# Altium PCB rk3288_backend.PcbDoc (part 3 of 3)
Units mm, origin at the board's own origin, x right, y up, seen from the top; angles counter-clockwise.
Board outline 46.39 x 100.03 mm, 4 copper layers (Top Layer, horizontal, vertical, Bottom Layer), stack 0.778 mm thick; 208 components, 207 nets, 778 pads, 333 vias.
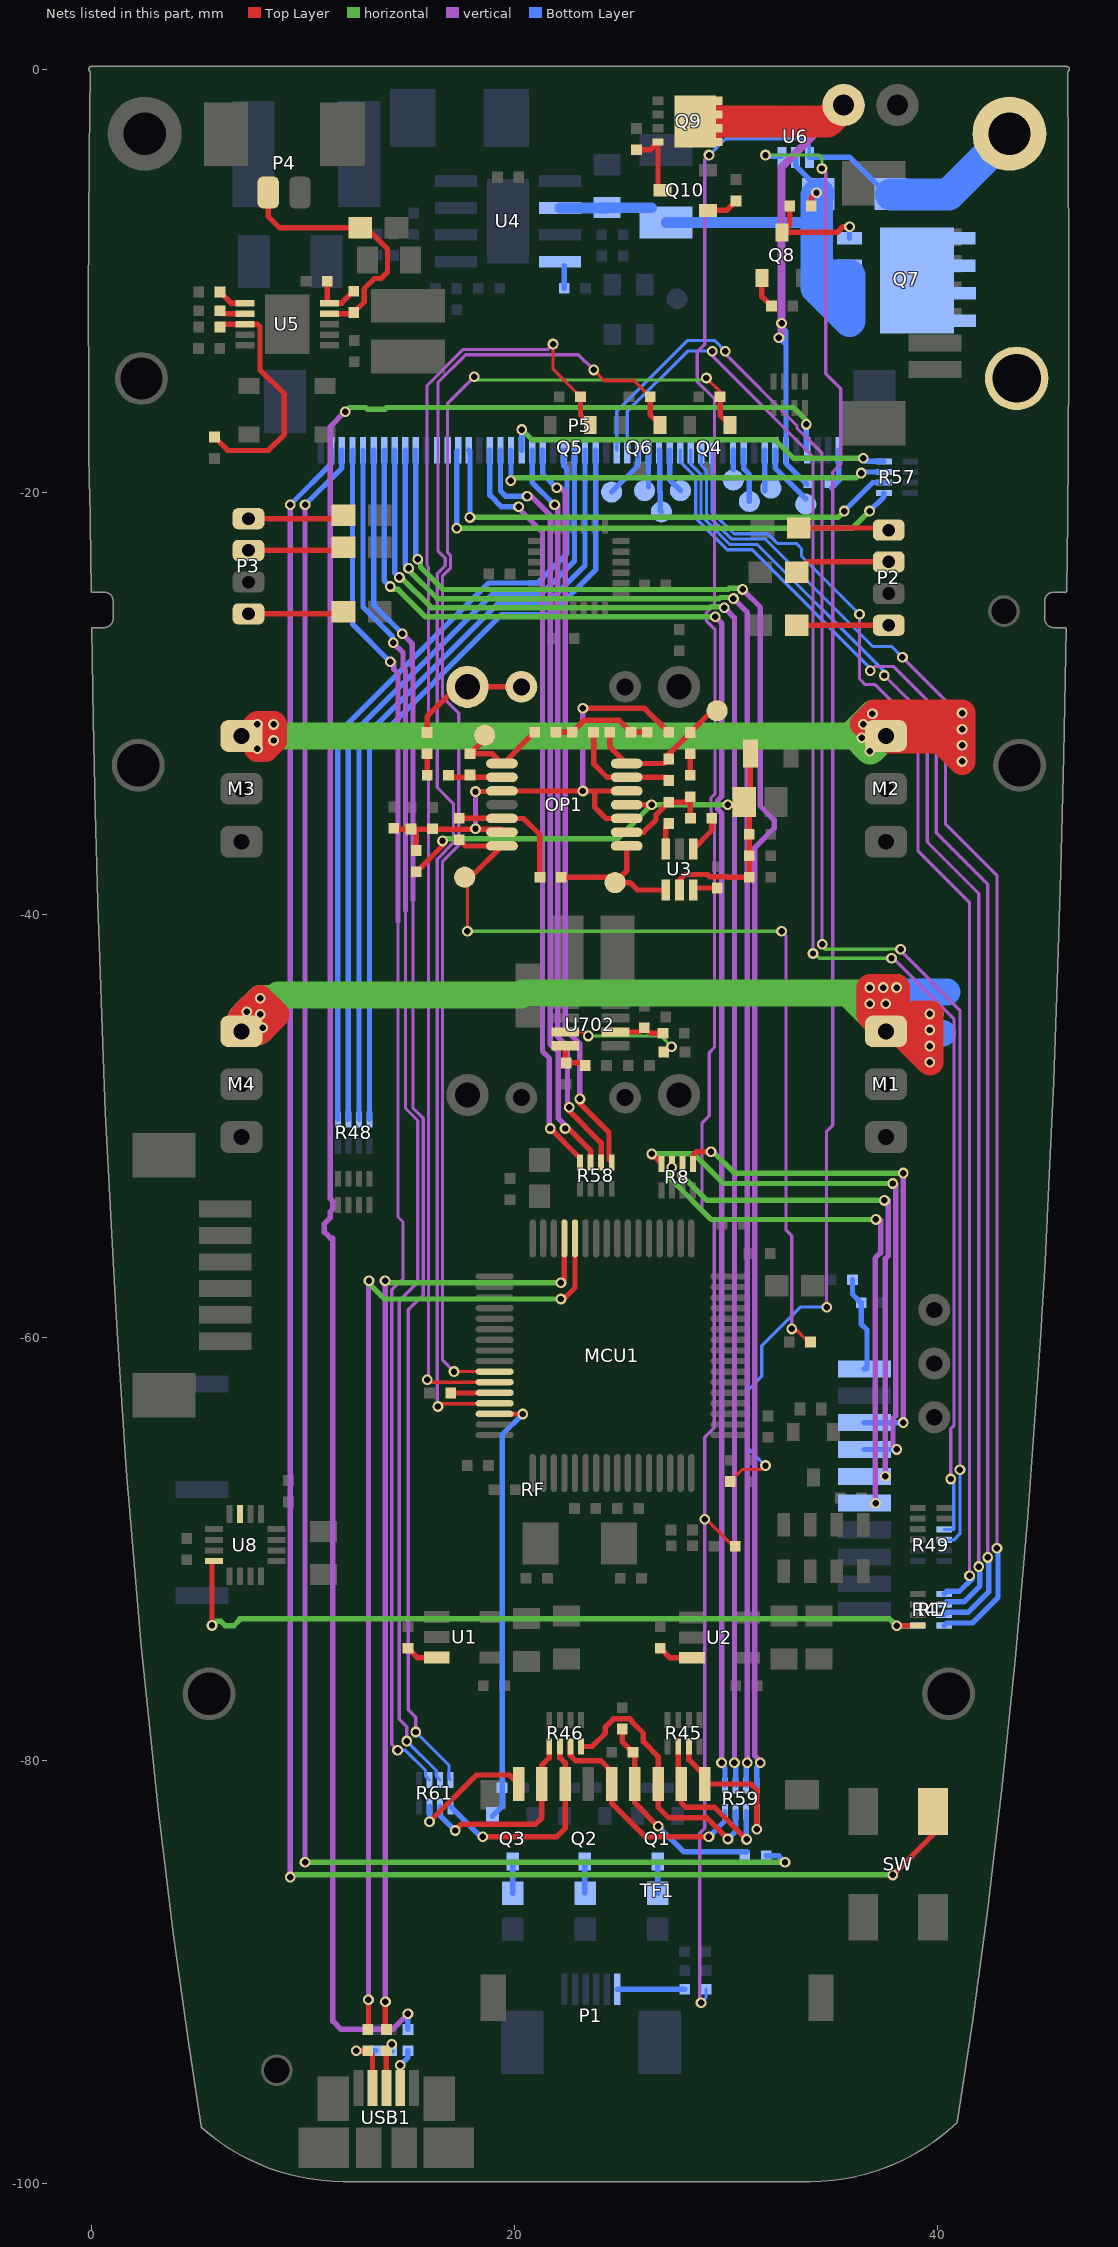
[diagram p5: the nets of this part, all layers, seen from the top]

## Via types
v1: diameter 0.508, hole 0.305, Top Layer to Bottom Layer, 289 vias
v2: diameter 0.508/0.508/0.508/0.508 (per signal layer), hole 0.305, Top Layer to Bottom Layer, 44 vias

## Nets (pads, with @x,y where several pads share a name; then routed paths per layer and width w, separated by ;. In a path a pad name is that pad's centre, name@x,y a point inside that pad or via, vN(x,y) a via of type N, cw(c..) or ccw(c..) an arc to the next point about the centre after c; other vN are vias at no path point) (continued)
NetMCU1_58: MCU1.58 Q4.3 R22.1 | length 64.4
  Top Layer w0.152: v1(17.145,-61.595) 17.146,-61.596 MCU1.58@19.067,-61.596 ; v1(29.083,-14.605) 29.731,-15.253 R22.1@29.731,-15.493
  Top Layer w0.254: R22.1@29.731,-15.493 29.731,-16.368 Q4.3@30.194,-16.831
  vertical w0.152: v1(17.145,-61.595) 16.608,-61.058 16.608,-37.462 17.372,-36.698 17.372,-30.462 16.608,-29.698 16.608,-23.962 16.986,-23.584 16.986,-23.016 16.84,-22.87 16.84,-15.799 v1(18.097,-14.541)
  horizontal w0.152: v1(18.097,-14.541) 18.251,-14.695 28.919,-14.695 28.956,-14.732 v1(29.083,-14.605)
NetMCU1_59: MCU1.59 Q5.3 R23.1 | length 61.6
  Top Layer w0.152: v1(15.875,-61.976) 15.995,-62.096 MCU1.59@19.067,-62.096 ; v1(21.832,-13) 21.832,-14.197 R23.1@23.129,-15.493
  Top Layer w0.254: R23.1@23.129,-15.493 23.129,-16.368 Q5.3@23.592,-16.831
  vertical w0.152: v1(15.875,-61.976) 15.94,-61.911 15.94,-23.55 15.868,-23.479 15.868,-14.975 17.591,-13.252 21.581,-13.252 v1(21.832,-13)
NetMCU1_60: MCU1.60 R3.2 | length 2.1
  Top Layer w0.254: R3.2@16.997,-62.611 MCU1.60@19.052,-62.611
NetMCU1_61: MCU1.61 Q6.3 R24.1 | length 65.1
  Top Layer w0.152: v1(16.383,-63.246) 16.51,-63.119 19.044,-63.119 MCU1.61@19.067,-63.096 ; v1(23.749,-14.224) 24.257,-14.732 25.666,-14.732 R24.1@26.427,-15.493
  Top Layer w0.254: R24.1@26.427,-15.493 26.427,-16.368 Q6.3@26.89,-16.831
  vertical w0.152: v1(16.383,-63.246) 16.354,-63.217 16.354,-37.357 17.118,-36.593 17.118,-34.735 16.354,-33.971 16.354,-23.857 16.732,-23.479 16.732,-23.121 16.383,-22.772 16.383,-14.819 17.697,-13.506 23.031,-13.506 v1(23.749,-14.224)
NetMCU1_62: MCU1.62 Q3.3 R21.1 | length 20.9
  Top Layer w0.254: MCU1.62@19.071,-63.6 v1(20.4,-63.6)
  Bottom Layer w0.254: Q3.3@18.968,-82.618 19.418,-82.168 R21.1@19.418,-81.28 19.418,-64.582 v1(20.4,-63.6)
NetOP1_1: OP1.1 RX-R8.1 T2.1 U3.4 | length 7.2
  Top Layer w0.254: RX-R8.1@22.215,-38.216 24.509,-38.216 T2.1@24.763,-38.47 ; OP1.1@25.313,-36.737 25.313,-37.92 T2.1@24.763,-38.47 ; U3.4@27.161,-38.818 25.818,-38.818 25.47,-38.47 T2.1@24.763,-38.47
NetOP1_2: OP1.2 RX-C3.2 RX-R18.1 RX-R22.1 | length 4.8
  Top Layer w0.254: OP1.2@25.313,-36.087 26.113,-36.087 26.7,-35.5 26.7,-35.271 RX-R22.1@27.303,-34.668 28.057,-34.668 RX-C3.2@28.319,-34.406 RX-R18.1@28.319,-35.414
NetOP1_3: OP1.3 OP1.5 OP1.10 OP1.13 RX-C7.1 RX-C8.1 RX-R10.1 RX-R11.1 RX-R15.2 | length 26.3
  Top Layer w0.254: RX-C8.1@14.3,-35.955 RX-R15.2@15.137,-35.955 ; RX-R15.2@15.111,-35.93 RX-R15.2@15.137,-35.955 ; RX-R11.1@15.365,-36.954 15.365,-36.184 RX-R15.2@15.137,-35.955 ; v1(18.161,-35.917) v1@18.123,-35.955 ; v1(18.161,-34.163) 19.387,-34.163 OP1.10@19.413,-34.137 v1(23.241,-34.137) 23.8,-34.137 ; OP1.13@19.413,-36.087 19.413,-35.955 v1@18.123,-35.955 ; v1(23.241,-30.226) 26.163,-30.226 RX-R10.1@27.295,-31.358 ; OP1.3@25.313,-35.437 24.337,-35.437 23.8,-34.9 23.8,-34.137 ; OP1.5@25.313,-34.137 23.8,-34.137 ; RX-R15.2@15.137,-35.955 v1@18.123,-35.955
  vertical w0.254: v1(18.161,-35.917) v1(18.161,-34.163) ; v1(23.241,-34.137) v1(23.241,-30.226)
NetOP1_6: OP1.6 RX-C4.2 RX-R5.1 | length 5.4
  Top Layer w0.254: RX-C4.2@23.747,-31.358 23.747,-32.847 24.387,-33.487 OP1.6@25.313,-33.487 27.154,-33.487 RX-R5.1@27.303,-33.636
NetOP1_7: OP1.7 RX-C1.2 RX-R5.2 RX-R7.1 T3.1 | length 7
  Top Layer w0.254: RX-C1.2@24.509,-31.358 24.509,-32.033 OP1.7@25.313,-32.837 27.094,-32.837 RX-R5.2@27.303,-32.628 27.303,-32.382 RX-R7.1@28.319,-31.366 T3.1@29.343,-30.342
NetOP1_8: OP1.8 RX-R1.2 RX-R6.1 T1.1 | length 4.6
  Top Layer w0.254: T1.1@18.413,-31.866 RX-R1.2@17.905,-32.374 18.95,-32.374 OP1.8@19.413,-32.837 19.482,-32.837 RX-R6.1@20.961,-31.358
NetOP1_9: OP1.9 RX-C2.2 RX-R1.1 | length 2.6
  Top Layer w0.254: RX-C2.2@16.889,-33.39 16.986,-33.487 OP1.9@19.413,-33.487
NetOP1_12: OP1.12 RX-R3.1 RX-R8.2 | length 6.1
  Top Layer w0.254: RX-R3.1@17.397,-35.43 OP1.12@19.406,-35.43 ; OP1.12@19.413,-35.437 20.437,-35.437 21.207,-36.207 RX-R8.2@21.207,-38.216
NetOP1_14: OP1.14 RX-R3.2 RX-R9.1 T4.1 | length 42.1
  Top Layer w0.152: T4.1@17.651,-38.216 17.78,-38.345 v1(17.78,-40.767) ; v1(33.117,-59.579) 33.29,-59.579 33.909,-60.198 RX-R9.1@34.007,-60.198
  Top Layer w0.254: RX-R3.2@17.397,-36.438 17.696,-36.737 OP1.14@19.413,-36.737 17.934,-38.216 T4.1@17.651,-38.216
  vertical w0.152: v1(32.639,-40.767) 32.842,-40.97 32.842,-54.891 33.117,-55.166 v1(33.117,-59.579)
  horizontal w0.152: v1(17.78,-40.767) v1(32.639,-40.767)
NetP1_1: P1.1 R4.1 | length 3.2
  Bottom Layer w0.254: P1.1@24.871,-90.805 R4.1@28.054,-90.805
NetP2_1: P2.1 R36.1 | length 4.4
  Top Layer w0.254: R36.1@33.35,-26.3 P2.1@37.7,-26.3
NetP2_3: P2.3 R37.1 | length 4.6
  Top Layer w0.254: R37.1@33.35,-23.8 33.85,-23.3 P2.3@37.7,-23.3
NetP2_4: P2.4 R38.1 | length 4.2
  Top Layer w0.254: R38.1@33.45,-21.7 P2.4@37.6,-21.7
NetP3_1: P3.1 R33.1 | length 4.4
  Top Layer w0.254: P3.1@7.424,-25.759 R33.1@11.822,-25.759
NetP3_3: P3.3 R34.1 | length 4.3
  Top Layer w0.254: P3.3@7.424,-22.759 R34.1@11.774,-22.759
NetP3_4: P3.4 R35.1 | length 4.3
  Top Layer w0.254: P3.4@7.424,-21.259 R35.1@11.75,-21.259
NetP4_1: P4.1 R5.2 R27.2 U5.9 | length 12.4
  Top Layer w0.254: P4.1@8.361,-5.834 8.361,-6.961 8.9,-7.5 R5.2@12.712,-7.5 13.002,-7.5 14,-8.498 14,-9.6 13.7,-9.9 13.381,-9.9 12.9,-10.381 12.9,-11.008 R27.2@12.4,-11.508 12.343,-11.565 U5.9@11.25,-11.565
NetP5_1: P5.1 R62.2 | length 1.9
  Bottom Layer w0.254: R62.2@35.008,-19.8 35.343,-19.465 P5.1@35.343,-18.014
NetP5_4: P5.4 R55.2 | length 105.3
  vertical w0.254: v1(12,-16.2) 11.3,-16.9 11.3,-53.418 11.408,-53.525 11.408,-53.925 11.3,-54.032 11.3,-54.317 11.017,-54.6 11.017,-55 11.3,-55.282 11.417,-55.282 11.417,-92.317 11.8,-92.7 14.231,-92.7 v1(14.965,-91.965)
  horizontal w0.254: v1(12,-16.2) 12.198,-16.002 12.963,-16.002 13.052,-16.091 13.872,-16.091 13.961,-16.002 33.202,-16.002 33.8,-16.6 v1(33.8,-16.8)
  Bottom Layer w0.254: R55.2@14.965,-92.71 v1(14.965,-91.965) ; P5.4@33.8,-17.971 v1(33.8,-16.8) v1@33.8,-16.7
NetP5_7: P5.7 T5.1 | length 2.9
  Bottom Layer w0.254: P5.7@32.343,-18.014 32.343,-18.881 33.126,-19.664 T5.1@33.782,-20.32
NetP5_8: P5.8 T6.1 | length 1.9
  Bottom Layer w0.254: T6.1@31.843,-19.939 P5.8@31.843,-18.014
NetP5_10: P5.10 T7.1 | length 2.5
  Bottom Layer w0.254: P5.10@30.843,-18.014 30.843,-18.891 31.082,-19.129 31.082,-19.144 31.115,-19.177 T7.1@31.115,-20.447
NetP5_11: P5.11 T8.1 | length 0.9
  Bottom Layer w0.254: T8.1@30.343,-18.957 P5.11@30.343,-18.014
NetP5_13: P5.13 R47.1 | length 61.8
  vertical w0.152: v1(36.322,-25.781) 36.322,-28.829 36.599,-29.106 37.061,-29.106 39.093,-31.138 39.093,-36.98 41.529,-39.416 41.529,-70.636 ; v1(41.529,-71.247) 41.528,-70.637
  Bottom Layer w0.152: P5.13@29.343,-18.014 29.343,-20.926 30.389,-21.971 31.982,-21.971 32.439,-22.428 33.326,-22.428 33.579,-22.681 33.579,-23.038 v1(36.322,-25.781)
  Bottom Layer w0.254: R47.1@40.328,-72.11 40.455,-71.983 41.047,-71.983 41.656,-71.374 v1(41.529,-71.247)
NetP5_14: P5.14 R47.4 | length 64.6
  vertical w0.152: v1(38.354,-27.813) 40.386,-29.845 40.386,-35.687 42.822,-38.123 v1(42.822,-69.954)
  Bottom Layer w0.152: P5.14@28.843,-18.014 28.843,-18.726 29.083,-18.966 29.083,-21.025 30.283,-22.225 31.877,-22.225 36.957,-27.305 37.846,-27.305 v1(38.354,-27.813)
  Bottom Layer w0.254: R47.4@40.328,-73.61 40.455,-73.483 41.668,-73.483 42.874,-72.278 42.874,-70.005 v1(42.822,-69.954)
NetP5_15: P5.15 R47.2 | length 62
  vertical w0.152: v1(37.492,-28.675) 39.524,-30.707 39.524,-36.549 41.96,-38.985 41.96,-70.205 ; v1(41.96,-70.816) 41.959,-70.206
  Bottom Layer w0.152: P5.15@28.343,-18.014 28.343,-18.691 28.829,-19.177 28.829,-21.13 30.178,-22.479 31.496,-22.479 v1@37.492,-28.475
  Bottom Layer w0.254: R47.2@40.328,-72.61 40.455,-72.483 41.254,-72.483 42.012,-71.726 42.012,-70.867 v1(41.96,-70.816)
NetP5_16: P5.16 R47.3 | length 64.3
  vertical w0.152: v1(36.83,-28.448) 37.034,-28.244 37.312,-28.244 ; 37.313,-28.243 37.922,-28.243 39.955,-30.276 39.955,-36.118 42.391,-38.554 42.391,-69.774 ; v1@42.39,-70.384 42.39,-69.775
  Bottom Layer w0.152: P5.16@27.843,-18.014 27.843,-18.572 28.575,-19.304 28.575,-21.235 30.073,-22.733 31.242,-22.733 v1@36.957,-28.448
  Bottom Layer w0.254: R47.3@40.328,-73.11 40.455,-72.983 41.461,-72.983 42.443,-72.002 42.443,-70.436 v1(42.391,-70.385)
NetP5_17: P5.17 T9.1 | length 2.1
  Bottom Layer w0.254: P5.17@27.343,-18.014 27.343,-19.422 T9.1@27.855,-19.934
NetP5_18: P5.18 T10.1 | length 3
  Bottom Layer w0.254: P5.18@26.843,-18.014 26.884,-18.055 26.884,-19.984 26.9,-20 26.9,-20.879 T10.1@26.955,-20.934
NetP5_19: P5.19 T11.1 | length 1.7
  Bottom Layer w0.254: T11.1@26.343,-19.746 P5.19@26.343,-18.014
NetP5_20: P5.20 T12.1 | length 2.5
  Bottom Layer w0.254: T12.1@24.6,-20 25.843,-18.757 P5.20@25.843,-18.014
NetP5_21: P5.21 R49.1 | length 70.2
  vertical w0.152: v1(29.362,-13.335) 29.362,-13.56 34.124,-18.321 34.124,-41.211 ; v1(34.124,-41.822) 34.124,-41.212 ; v1(37.835,-42.048) 37.912,-42.048 40.797,-44.933 40.797,-64.143 40.639,-64.301 v1(40.64,-66.675)
  horizontal w0.152: v1(34.124,-41.822) 34.202,-41.822 34.428,-42.048 v1(37.835,-42.048)
  Bottom Layer w0.152: P5.21@25.343,-18.014 25.343,-16.186 28.194,-13.335 v1(29.362,-13.335) ; R49.1@40.328,-69.062 40.78,-69.062 40.78,-66.815 v1(40.64,-66.675)
NetP5_22: P5.22 R49.2 | length 72
  vertical w0.152: v1(29.972,-13.335) 29.972,-13.462 33.368,-16.858 33.368,-16.979 34.555,-18.166 v1(34.555,-41.391) ; v1(38.266,-41.617) 38.266,-41.695 41.071,-44.5 v1(41.071,-66.244)
  horizontal w0.152: v1(34.555,-41.391) 34.555,-41.468 34.704,-41.617 37.655,-41.617 ; 37.656,-41.617 v1@38.265,-41.617
  Bottom Layer w0.152: P5.22@24.843,-18.014 24.843,-16.178 28.194,-12.827 29.465,-12.827 v1(29.972,-13.335) ; R49.2@40.328,-69.562 40.78,-69.562 41.072,-69.27 v1@41.072,-66.245
NetP5_24: P5.24 R48.8 | length 37.4
  Bottom Layer w0.254: R48.8@13.15,-49.675 13.15,-32.05 19.4,-25.8 21.721,-25.8 23.843,-23.678 P5.24@23.843,-18.014
NetP5_25: P5.25 R48.7 | length 37.4
  Bottom Layer w0.254: R48.7@12.65,-49.675 12.65,-31.843 19.193,-25.3 21.514,-25.3 23.343,-23.471 P5.25@23.343,-18.014
NetP5_26: P5.26 R48.6 | length 37.4
  Bottom Layer w0.254: R48.6@12.15,-49.675 12.15,-31.636 18.986,-24.8 21.307,-24.8 22.843,-23.264 P5.26@22.843,-18.014
NetP5_27: P5.27 R48.5 | length 37.6
  Bottom Layer w0.254: R48.5@11.65,-49.675 11.65,-31.429 18.779,-24.3 21.1,-24.3 22.488,-22.912 22.488,-18.911 22.343,-18.766 P5.27@22.343,-18.014
NetP5_29: P5.29 R58.5 | length 35.2
  Top Layer w0.254: v1(23.1,-48.7) 23.1,-48.914 24.478,-50.292 24.478,-51.572 R58.5@24.605,-51.699
  vertical w0.254: v1(22,-19.8) 22.2,-19.8 22.4,-20 22.4,-45.4 23.1,-46.1 v1(23.1,-48.7)
  Bottom Layer w0.254: P5.29@21.343,-18.014 21.343,-19.143 v1(22,-19.8)
NetP5_30: P5.30 R58.6 | length 35.3
  Top Layer w0.254: v1(22.6,-49.1) 22.6,-49.276 24.105,-50.781 R58.6@24.105,-51.699
  vertical w0.254: v1(21.9,-20.6) 22.044,-20.6 22.044,-45.752 22.511,-46.218 22.511,-49.186 22.597,-49.1 v1(22.6,-49.1)
  Bottom Layer w0.254: P5.30@20.843,-18.014 20.843,-19.543 v1(21.9,-20.6)
NetP5_31: P5.31 R57.4 | length 18.7
  horizontal w0.254: v1(20.343,-17.043) 20.826,-17.526 32.326,-17.526 33.2,-18.4 v1(36.5,-18.4)
  Bottom Layer w0.254: P5.31@20.343,-18.014 v1(20.343,-17.043) ; v1(36.5,-18.4) 36.65,-18.55 R57.4@37.475,-18.55
NetP5_32: P5.32 R57.3 | length 19.3
  horizontal w0.254: v1(19.826,-19.464) 19.972,-19.317 36.183,-19.317 v1(36.4,-19.1)
  Bottom Layer w0.254: v1(19.826,-19.464) 19.8,-19.438 19.8,-19.4 19.843,-19.357 P5.32@19.843,-18.014 ; v1(36.4,-19.1) 36.45,-19.05 R57.3@37.475,-19.05
NetP5_33: P5.33 R58.7 | length 36.2
  Top Layer w0.254: v1(22.4,-50.1) 22.562,-50.1 23.605,-51.143 R58.7@23.605,-51.699
  vertical w0.254: v1(20.6,-20.2) 20.8,-20.2 21.689,-21.089 21.689,-46.103 22.079,-46.494 22.079,-49.617 22.4,-49.938 v1(22.4,-50.1)
  Bottom Layer w0.254: P5.33@19.343,-18.014 19.343,-19.943 19.6,-20.2 v1(20.6,-20.2)
NetP5_34: P5.34 R58.8 | length 35.9
  Top Layer w0.254: v1(21.7,-50.1) 23.105,-51.505 R58.8@23.105,-51.699
  vertical w0.254: v1(20.2,-20.7) 20.2,-20.767 21.333,-21.9 21.333,-46.455 21.648,-46.77 21.648,-50.048 v1(21.7,-50.1)
  Bottom Layer w0.254: P5.34@18.843,-18.014 18.843,-20.143 19.4,-20.7 v1(20.2,-20.7)
NetP5_36: P5.36 R57.2 | length 23.5
  horizontal w0.254: v1(17.9,-21.2) 35.3,-21.2 v1(35.6,-20.9)
  Bottom Layer w0.254: P5.36@17.843,-18.014 17.9,-18.071 v1(17.9,-21.2) ; v1(35.6,-20.9) 36.95,-19.55 R57.2@37.475,-19.55
NetP5_37: P5.37 R57.1 | length 24.7
  horizontal w0.254: v1(17.272,-21.717) 35.983,-21.717 36,-21.7 v1(36.8,-20.9)
  Bottom Layer w0.254: v1(17.272,-21.717) 17.272,-18.086 P5.37@17.3,-18.058 ; v1(36.8,-20.9) 37.475,-20.225 R57.1@37.475,-20.05
NetP5_38: P5.38
NetP5_39: P5.39
NetP5_41: P5.41 R59.8 | length 79.1
  vertical w0.254: v1(30.793,-24.607) 31.628,-25.442 31.628,-34.845 32.283,-35.5 32.283,-35.9 31.374,-36.809 31.374,-79.773 31.628,-80.027 v1(31.628,-80.1)
  horizontal w0.254: v1(15.427,-23.173) 15.561,-23.307 15.561,-23.539 16.628,-24.607 30.111,-24.607 30.162,-24.555 30.742,-24.555 v1(30.793,-24.607)
  Bottom Layer w0.254: P5.41@15.343,-18.014 15.343,-23.09 v1(15.427,-23.173) ; R59.8@31.463,-81.163 31.463,-80.337 31.628,-80.173 v1(31.628,-80.1)
NetP5_42: P5.42 R59.7 | length 78.1
  vertical w0.254: v1(30.362,-25.038) 31.018,-25.694 v1(31.018,-80.1)
  horizontal w0.254: v1(14.996,-23.604) 14.996,-23.682 16.352,-25.038 29.68,-25.038 29.731,-24.986 30.311,-24.986 v1(30.362,-25.038)
  Bottom Layer w0.254: P5.42@14.843,-18.014 14.843,-23.452 v1(14.996,-23.604) ; R59.7@30.963,-81.163 30.963,-80.155 v1(31.018,-80.1)
NetP5_43: P5.43 R59.6 | length 78.2
  vertical w0.254: v1(29.931,-25.469) 30.409,-25.947 30.409,-34.426 30.57,-34.587 30.57,-34.987 30.409,-35.148 v1(30.409,-80.1)
  horizontal w0.254: v1(14.565,-24.035) 14.642,-24.035 16.076,-25.469 29.249,-25.469 29.3,-25.417 29.879,-25.417 v1(29.931,-25.469)
  Bottom Layer w0.254: P5.43@14.343,-18.014 14.343,-23.814 v1(14.565,-24.035) ; v1(30.409,-80.1) 30.463,-80.155 R59.6@30.463,-81.163
NetP5_44: P5.44 R59.5 | length 78.1
  vertical w0.254: v1(29.5,-25.9) 29.799,-26.199 29.799,-34.392 29.604,-34.587 29.604,-34.987 29.799,-35.182 v1(29.799,-80.1)
  horizontal w0.254: v1(14.134,-24.466) 14.268,-24.6 14.5,-24.6 15.8,-25.9 v1(29.5,-25.9)
  Bottom Layer w0.254: P5.44@13.843,-18.014 13.843,-24.176 v1(14.134,-24.466) ; v1(29.799,-80.1) 29.799,-80.173 29.963,-80.337 R59.5@29.963,-81.163
NetP5_45: P5.45 R61.8 | length 65
  vertical w0.152: 15.207,-39.283 15.207,-49.138 15.686,-49.616 15.686,-57.974 14.986,-58.674 14.986,-77.597 15.34,-77.951 v1(15.34,-78.64)
  vertical w0.254: v1(14.7,-26.7) 15.162,-27.162 15.162,-28.236 15.207,-28.281 15.207,-39.283
  Bottom Layer w0.152: v1(15.34,-78.64) 16.909,-80.209 16.909,-80.833 R61.8@16.985,-80.909
  Bottom Layer w0.254: P5.45@13.343,-18.014 13.343,-25.343 v1(14.7,-26.7)
NetP5_46: P5.46 R61.7 | length 65.1
  vertical w0.152: 14.852,-39.79 14.852,-49.141 15.432,-49.721 15.432,-57.366 14.555,-58.243 14.555,-78.028 14.909,-78.382 14.909,-78.46 ; v1(14.909,-79.071) 14.908,-78.461
  vertical w0.254: v1(14.269,-27.131) 14.731,-27.593 14.731,-28.308 14.852,-28.429 14.852,-39.79
  Bottom Layer w0.152: v1(14.909,-79.071) 14.914,-79.071 16.303,-80.46 16.303,-80.727 R61.7@16.485,-80.909
  Bottom Layer w0.254: P5.46@12.843,-18.014 12.843,-25.443 14.217,-26.817 14.217,-27.08 v1(14.269,-27.131)
NetP5_47: P5.47 R61.6 | length 65.2
  vertical w0.152: v1(14.478,-79.502) 14.205,-79.229 14.205,-57.731 14.732,-57.204 14.732,-54.521 14.496,-54.286 14.496,-40.296
  vertical w0.254: v1(14.124,-28.024) 14.3,-28.024 14.3,-28.38 14.496,-28.576 14.496,-40.296
  Bottom Layer w0.152: v1@14.479,-79.503 14.846,-79.503 15.803,-80.46 15.803,-80.727 R61.6@15.985,-80.909
  Bottom Layer w0.254: P5.47@12.343,-18.014 12.343,-26.243 v1(14.124,-28.024)
NetP5_49: P5.49 SW.2 | length 101.1
  Top Layer w0.254: v1(37.9,-85.4) 39.8,-83.5 SW.2@39.8,-82.4 SW.2@39.3,-82.4
  vertical w0.254: v1(9.4,-85.5) v1(9.4,-20.6)
  horizontal w0.254: v1(9.4,-85.5) 9.5,-85.4 v1(37.9,-85.4)
  Bottom Layer w0.254: v1(9.4,-20.6) 11.343,-18.657 P5.49@11.343,-18.014
NetQ1_D: Q1.1 R30.2 | length 1.5
  Bottom Layer w0.254: R30.2@26.776,-86.258 Q1.1@26.776,-84.768
NetQ2_D: Q2.1 R31.2 | length 1.5
  Bottom Layer w0.254: R31.2@23.334,-86.245 Q2.1@23.334,-84.768
NetQ3_D: Q3.1 R32.2 | length 1.5
  Bottom Layer w0.254: R32.2@19.918,-86.258 Q3.1@19.918,-84.768
NetQ7_G: Q7.G Q8.1 R39.1 | length 5.2
  Top Layer w0.254: R39.1@33.028,-6.477 33.028,-7.346 Q8.1@32.657,-7.717 35.283,-7.717 35.552,-7.448 v1(35.852,-7.448)
  Bottom Layer w0.254: Q7.G@35.852,-7.996 v1(35.852,-7.448)
NetQ8_G: Q8.3 R40.1 | length 1.5
  Top Layer w0.254: Q8.3@31.707,-9.867 31.707,-10.755 R40.1@32.157,-11.205
NetQ9_G: Q9.G Q10.1 R41.1 | length 3.2
  Top Layer w0.254: R41.1@25.777,-3.817 26.42,-3.817 Q9.G@26.793,-3.444 Q10.1@26.793,-5.522
NetQ10_G: Q10.3 R42.1 | length 1.5
  Top Layer w0.254: Q10.3@29.151,-6.68 30.026,-6.68 R42.1@30.476,-6.23
NetR1_4: R1.4 R47.5 U8.4 | length 37.9
  Top Layer w0.254: v1(5.7,-73.6) 5.7,-70.652 U8.4@5.803,-70.549 ; v1(38.09,-73.61) R1.4@39.078,-73.61
  horizontal w0.254: v1(5.7,-73.6) 5.894,-73.406 6.118,-73.406 6.328,-73.617 6.728,-73.617 7.011,-73.334 7.011,-73.285 37.744,-73.285 37.865,-73.406 37.871,-73.412 37.892,-73.412 v1(38.09,-73.61)
  Bottom Layer w0.254: v1(38.09,-73.61) R47.5@39.078,-73.61
NetR8_5: R8.5 RF.3 | length 24.5
  Top Layer w0.254: R8.5@28.45,-51.775 28.45,-51.35 28.6,-51.2 v1(29.3,-51.2)
  vertical w0.254: v1(38.392,-64.008) v1(38.392,-52.208)
  horizontal w0.254: v1(29.3,-51.2) 29.4,-51.2 30.408,-52.208 v1(38.392,-52.208)
  Bottom Layer w0.254: RF.3@36.552,-64.009 v1(38.392,-64.008)
NetR8_6: R8.6 RF.5 | length 24
  Top Layer w0.254: v1(27.946,-52.294) 27.946,-51.779 R8.6@27.95,-51.775
  vertical w0.254: v1(37.5,-53.5) 37.519,-53.481 37.681,-53.481 37.681,-56.119 37.548,-56.252 v1(37.548,-66.548)
  horizontal w0.254: v1(27.946,-52.294) 27.94,-52.3 27.9,-52.3 29.1,-53.5 v1(37.5,-53.5)
NetR8_7: R8.7 RF.6 | length 24.8
  Top Layer w0.254: R8.7@27.446,-51.954 v1(27.446,-51.932)
  vertical w0.254: v1(37.082,-67.818) 37.065,-67.801 37.065,-56.232 37.325,-55.972 37.325,-54.425 37.3,-54.4 v1(37.1,-54.4)
  horizontal w0.254: v1(27.446,-51.932) 27.4,-51.978 27.4,-52.5 29.3,-54.4 v1(37.1,-54.4)
NetR8_8: R8.8 RF.4 | length 27
  Top Layer w0.254: v1(26.5,-51.3) 26.95,-51.75 R8.8@26.95,-51.775
  vertical w0.254: v1(37.9,-52.7) 38,-52.7 38.036,-52.736 38.036,-63.681 37.909,-63.808 37.909,-65.109 v1(38.078,-65.278)
  horizontal w0.254: v1(26.5,-51.3) 28.5,-51.3 29.9,-52.7 v1(37.9,-52.7)
  Bottom Layer w0.254: RF.4@36.552,-65.279 v1(38.078,-65.278)
NetR10_2: R10.2 U1.3 | length 1.6
  Top Layer w0.254: R10.2@14.965,-74.676 15.41,-75.12 U1.3@16.332,-75.12
NetR11_2: R11.2 U2.3 | length 1.7
  Top Layer w0.254: R11.2@26.903,-74.676 27.361,-75.133 U2.3@28.397,-75.133
NetR12_1: R12.1 U6.6 | length 70.7
  Top Layer w0.152: R12.1@30.205,-66.794 30.774,-66.226 31.691,-66.226 v1(31.877,-66.04)
  vertical w0.152: v1(34.544,-4.699) 34.722,-4.877 34.722,-14.402 35.433,-15.113 35.433,-18.669 35.052,-19.05 35.052,-49.937 34.768,-50.221 v1(34.768,-58.547)
  horizontal w0.152: v1(31.877,-4.064) 34.417,-4.064 34.544,-4.191 v1(34.544,-4.699)
  Bottom Layer w0.152: v1(31.877,-66.04) 30.988,-65.151 30.988,-62.536 31.699,-61.825 31.699,-60.376 33.528,-58.547 v1(34.768,-58.547) ; v1(31.877,-4.064) 31.983,-4.17 U6.6@32.65,-4.17
NetR19_1: R19.1 U4.4 | length 1.1
  Bottom Layer w0.254: R19.1@22.361,-10.36 U4.4@22.361,-9.303
NetR25_2: R25.2 U5.2 | length 1
  Top Layer w0.254: R25.2@6.21,-11.565 U5.2@7.25,-11.565
NetR27_1: R27.1 R29.2 U5.10 | length 2.3
  Top Layer w0.254: U5.10@11.155,-10.97 R29.2@11.155,-10.033 ; U5.10@11.25,-11.065 11.835,-11.065 R27.1@12.4,-10.5
NetR28_2: R28.2 U5.1 | length 1.4
  Top Layer w0.254: R28.2@6.075,-10.541 6.599,-11.065 U5.1@7.25,-11.065
NetR43_2: R43.2 R65.2 U5.3 | length 11.3
  Top Layer w0.254: R65.2@5.818,-17.4 6.453,-18.035 8.358,-18.035 9.12,-17.273 9.12,-15.368 7.972,-14.22 7.972,-12.188 7.85,-12.066 U5.3@7.25,-12.065 ; R43.2@6.202,-12.065 U5.3@7.25,-12.065
NetR45_2: R45.2 R59.2 TF1.2 | length 7.3
  Top Layer w0.254: TF1.2@27.75,-80.95 R45.2@27.75,-79.325 ; TF1.2@27.9,-81.1 27.9,-82 28.1,-82.2 29.462,-82.2 v1(30.981,-83.719)
  Bottom Layer w0.254: 30.963,-83.436 R59.2@30.963,-82.413
NetR45_3: R45.3 R59.1 TF1.1 | length 7.4
  Top Layer w0.254: R45.3@28.25,-79.325 28.25,-79.95 29,-80.7 TF1.1@29,-81.1 31.2,-81.1 31.463,-81.363 v1(31.463,-83.237)
  Bottom Layer w0.254: v1(31.463,-83.237) R59.1@31.463,-82.413
NetR46_1: R46.1 R61.2 TF1.8 | length 9.3
  Top Layer w0.254: v1(17.2,-83.3) 17.5,-83 21,-83 21.3,-82.7 TF1.8@21.3,-81.1 21.3,-80.2 21.65,-79.85 R46.1@21.65,-79.325
  Bottom Layer w0.254: R61.2@16.485,-82.159 16.485,-82.585 v1(17.2,-83.3)
NetR46_2: R46.2 R61.1 TF1.7 | length 10.2
  Top Layer w0.254: v1(18.5,-83.6) 22,-83.6 22.4,-83.2 TF1.7@22.4,-81.1 22.4,-80.1 22.15,-79.85 R46.2@22.15,-79.325
  Bottom Layer w0.254: R61.1@16.985,-82.159 18.426,-83.6 v1(18.5,-83.6)
NetR46_3: R46.3 R59.4 TF1.5 | length 10.4
  Top Layer w0.254: R46.3@22.65,-79.325 22.65,-79.75 22.9,-80 24.1,-80 TF1.5@24.6,-80.5 ; TF1.5@24.6,-81.1 24.6,-82 26.2,-83.6 v1(29.2,-83.6)
  Bottom Layer w0.254: v1(29.2,-83.6) 29.963,-82.837 R59.4@29.963,-82.413
NetR46_4: R46.4 R59.3 TF1.3 | length 13.3
  Top Layer w0.254: R46.4@23.15,-79.117 R46.4@23.15,-79.325 23.675,-79.325 24.3,-78.7 24.3,-78.4 24.683,-78.017 25.449,-78.017 25.583,-78.151 25.583,-78.183 26.1,-78.7 26.1,-79.1 26.8,-79.8 TF1.3@26.8,-81.1 26.8,-82.2 27.3,-82.7 29.1,-82.7 v1(30.1,-83.7)
  Bottom Layer w0.254: v1(30.1,-83.7) 30.463,-83.337 R59.3@30.463,-82.413
NetR51_1: R51.1 R53.1 USB1.2 | length 3.4
  Top Layer w0.254: v1(12.518,-93.718) R51.1@13.06,-93.718 ; R51.1@13.082,-93.782 R51.1@13.082,-93.74 ; USB1.2@13.289,-95.479 13.289,-93.947 R51.1@13.082,-93.74 ; R51.1@13.06,-93.718 13.082,-93.718 R51.1@13.082,-93.74 ; R51.1@13.06,-93.718 R51.1@13.082,-93.74
  Bottom Layer w0.254: v1(12.518,-93.718) R53.1@13.441,-93.718
NetR52_1: R52.1 R54.1 USB1.3 | length 2.4
  Top Layer w0.254: USB1.3@13.949,-95.479 R52.1@13.949,-93.718 ; R52.1@13.949,-93.657 v1(14.203,-93.403)
  Bottom Layer w0.254: R54.1@14.203,-93.718 v1(14.203,-93.403)
NetR55_1: R55.1 USB1.4 | length 1.9
  Top Layer w0.254: USB1.4@14.599,-95.479 v1(14.599,-94.401)
  Bottom Layer w0.254: v1(14.599,-94.401) 14.965,-94.035 R55.1@14.965,-93.718
NetR61_3: R61.3 TF1.9 | length 6
  Top Layer w0.254: v1(15.985,-82.885) 18.2,-80.671 19.771,-80.671 TF1.9@20.2,-81.1
  Bottom Layer w0.254: v1(15.985,-82.885) R61.3@15.985,-82.159
NetR701_1: R701.1 U702.7 | length 5.8
  Top Layer w0.152: U702.7@22.408,-45.537 23.312,-45.537 v1(23.495,-45.72) ; R701.1@27.059,-46.482 27.313,-46.228 v1(27.432,-46.228)
  horizontal w0.152: v1(23.495,-45.72) 26.924,-45.72 v1(27.432,-46.228)
NetR702_1: R702.1 R703.2 U702.8 | length 1.5
  Top Layer w0.254: R702.1@22.408,-46.947 U702.8@22.408,-46.187 ; R702.1@22.458,-46.998 R703.2@23.228,-46.998
NetR705_2: R705.2 R706.1 U702.2 | length 2.2
  Top Layer w0.254: U702.2@24.776,-45.537 R706.1@25.935,-45.537 ; R706.1@26.141,-45.331 26.403,-45.593 R705.2@27.03,-45.593
NetR?_2: R?.2 RF.1 | length 4.6
  Bottom Layer w0.254: R?.2@35.993,-57.252 35.993,-57.938 R?.2@36.4,-58.345 36.4,-59.339 36.678,-59.617 36.678,-61.469 RF.1@36.552,-61.469
NetRX1_2: RX1.2 RX2.2 RX-R4.1 | length 5.8
  Top Layer w0.254: RX-R4.1@15.873,-31.366 15.873,-30.622 17.285,-29.21 RX1.2@17.785,-29.21 RX2.2@20.335,-29.21
NetRX-C1_1: RX-C1.1 RX-C4.1 RX-R6.2 RX-R10.2 | length 4.8
  Top Layer w0.254: RX-R6.2@21.969,-31.358 RX-C4.1@22.739,-31.358 23.297,-30.8 24.959,-30.8 RX-C1.1@25.517,-31.358 RX-R10.2@26.287,-31.358
NetRX-C2_1: RX-C2.1 RX-R4.2 | length 1
  Top Layer w0.254: RX-R4.2@15.873,-32.374 15.881,-32.382 RX-C2.1@15.881,-33.39
NetRX-C3_1: RX-C3.1 RX-R7.2 | length 1
  Top Layer w0.254: RX-C3.1@28.319,-33.398 RX-R7.2@28.319,-32.374
NetRX-R18_2: RX-R18.2 U3.1 | length 1.8
  Top Layer w0.254: U3.1@28.461,-36.878 29.335,-36.004 RX-R18.2@29.335,-35.422
NetRX-R20_2: RX-R20.2 U3.6 | length 1
  Top Layer w0.254: U3.6@28.555,-38.724 RX-R20.2@29.589,-38.724
NetRX-R22_2: RX-R22.2 U3.3 | length 1.1
  Top Layer w0.254: U3.3@27.161,-36.878 RX-R22.2@27.161,-35.818
NetU8_15: U8.15
USB_N: MCU1.44 R51.2 | length 48.1
  Top Layer w0.254: R51.2@13.1,-92.7 v1(13.1,-91.3) ; v1(22.2,-58.162) 22.336,-58.162 22.867,-57.631 MCU1.44@22.867,-55.296
  vertical w0.254: v1(13.1,-91.3) 13.1,-57.324 v1(13.124,-57.3)
  horizontal w0.254: v1(13.124,-57.3) 13.124,-57.436 13.85,-58.162 v1(22.2,-58.162)
USB_P: MCU1.45 R52.2 | length 45.8
  Top Layer w0.254: R52.2@13.9,-92.6 v1(13.9,-91.4) ; v1(22.2,-57.4) 22.367,-57.233 MCU1.45@22.367,-55.296
  vertical w0.254: v1(13.886,-57.3) 13.9,-57.314 v1(13.9,-91.4)
  horizontal w0.254: v1(13.886,-57.3) 13.986,-57.4 v1(22.2,-57.4)
V3288: 3288+.1 P5.6 Q9.D R62.1 | length 30.1
  Top Layer w0.254: Q9.D@29.693,-3.444 Q9.D@29.693,-2.794 29.693,-2.469 Q9.D@29.693,-2.144 Q9.D@29.693,-1.494
  Top Layer w1.524: Q9.D@28.553,-2.469 29.693,-2.469 34.808,-2.469 3288+.1@35.574,-1.703
  vertical w0.381: v1(32.512,-12.7) 32.639,-12.573 32.639,-12.192 32.639,-4.638 3288+.1@35.574,-1.703
  Bottom Layer w0.254: v1(32.512,-12.7) 32.843,-13.031 ; v2(32.639,-12.011) 32.639,-12.192 32.843,-12.396 32.843,-13.031 ; R62.1@33.838,-19.637 32.843,-18.643 P5.6@32.843,-18.014 32.843,-13.031
VBAT: Bat+.1 R4.2 R9.1 R13.1 U6.4 | length 108.8
  Top Layer w0.152: v1(29.004,-68.58) 29.083,-68.58 30.353,-69.85 R13.1@30.451,-69.85
  vertical w0.152: v1(28.829,-91.44) 28.768,-91.379 28.768,-83.421 29.004,-83.185 v1(29.004,-68.58) 29.004,-64.707 29.457,-64.254 29.457,-54.493 28.868,-53.905 28.868,-49.844 29.217,-49.495 29.217,-46.511 29.464,-46.264 29.464,-35.278 29.3,-35.113 29.3,-34.461 29.494,-34.266 29.494,-26.505 29.068,-26.079 29.068,-25.721 29.464,-25.325 29.464,-15.597 28.651,-14.784 28.651,-13.362 29.004,-13.009 29.004,-4.27 v1(29.21,-4.064)
  Bottom Layer w0.152: v1(28.829,-91.44) 29.062,-91.207 R4.2@29.062,-90.805 ; v1(29.21,-4.064) 29.972,-3.302 33.655,-3.302 33.95,-3.597 U6.4@33.95,-4.17
  Bottom Layer w0.254: U6.4@33.95,-4.17 35.87,-4.17 R9.1@37.6,-5.9
  Bottom Layer w1.524: R9.1@37.825,-5.925 40.537,-5.925 Bat+.1@43.413,-3.048
VCC-3288-TF: P5.48 R60.2 | length 91.2
  vertical w0.254: v1(10.1,-84.8) v1(10.1,-20.6)
  horizontal w0.254: v1(10.1,-84.8) v1(32.8,-84.8)
  Bottom Layer w0.254: v1(10.1,-20.6) 11.843,-18.857 P5.48@11.843,-18.014 ; R60.2@31.908,-84.5 32.5,-84.5 v1(32.8,-84.8)
VCC-RX: OP1.4 rx-L1.2 RX-R11.2 RXC-1.2 RXC-2.2 RXC-3.2 RXC-4.2 U3.5 | length 27.5
  Top Layer w0.254: RX-R11.2@15.365,-37.962 16.6,-36.728 v1(16.6,-36.5) ; OP1.4@25.313,-34.787 v1(26.487,-34.787) ; U3.5@27.811,-38.818 27.811,-38.356 28.078,-38.089 29.132,-38.089 29.241,-38.199 30.071,-38.199 30.099,-38.227 30.11,-38.216 RXC-2.2@31.113,-38.216 RXC-3.2@31.113,-37.2 RXC-4.2@31.113,-36.184 RXC-1.2@31.113,-34.902 ; v1(30.087,-34.787) 30.744,-34.787 RXC-1.2@30.871,-34.66 ; RXC-1.2@31.164,-34.367 rx-L1.2@31.164,-32.374
  horizontal w0.254: v1(16.6,-36.5) 16.6,-36.4 24.874,-36.4 v1(26.487,-34.787) v1(30.087,-34.787)
VCC_TF: 0R/NC.1 C37.2 R60.1 TF1.4 | length 9.9
  Top Layer w0.254: 0R/NC.1@25.1,-78.5 25.1,-79.092 C37.2@25.608,-79.6 ; C37.2@25.7,-79.692 TF1.4@25.7,-81.1 25.7,-82 v1(26.8,-83.1)
  Bottom Layer w0.254: v1(26.8,-83.1) 28,-84.3 R60.1@31,-84.3
VMOTOR: M1.1 M2.1 M3.1 M4.1 pad.0@43.753,-14.621 Q7.D | length 125.6
  Top Layer w1.27: M3.1@7.099,-31.536 7.303,-31.536 v2(7.85,-30.989) v2(8.612,-30.989) v2(8.612,-31.751) 8.231,-32.132 v2(7.85,-32.132) ; v1(36.506,-30.975) 37.026,-30.455 v2(41.173,-30.455) ; v2(37.568,-44.197) 37.841,-44.47 37.841,-44.588 38.076,-44.354 v2(38.076,-43.435) v2(37.441,-43.435) v2(36.806,-43.435) v2(36.806,-44.197) 36.806,-44.733 M1.1@37.579,-45.506 ; M1.1@37.666,-45.593 M1.1@37.579,-45.506 ; M1.1@37.579,-45.506 M1.1@38.191,-45.506 ; M1.1@38.191,-45.506 v2(39.649,-46.965) v2(39.649,-46.203) v2(39.649,-45.441) v2(39.649,-44.679) 39.018,-44.679 M1.1@38.191,-45.506 ; v2(41.173,-30.455) v2(41.173,-31.217) v2(41.173,-31.979) v2(41.173,-32.741) 40.157,-31.725 37.768,-31.725 M2.1@37.579,-31.536 40.092,-31.536 v2(41.173,-30.455) ; M4.1@7.099,-45.506 7.099,-44.82 v2(7.342,-44.578) v2(7.977,-43.943) 8.739,-44.705 v2(8.104,-45.34) 7.938,-45.506 M4.1@7.099,-45.506
  horizontal w1.27: M3.1@7.099,-31.536 35.878,-31.536 ; v2(7.977,-44.705) 7.977,-45.213 v2(8.104,-45.34) 7.938,-45.506 M4.1@7.099,-45.506 ; M1.1@37.251,-45.506 M1.1@37.579,-45.506 35.761,-43.688 ; v2(38.076,-43.435) v2(37.441,-43.435) 37.822,-43.816 37.822,-44.578 36.932,-43.688 35.761,-43.688 ; M4.1@7.099,-45.506 7.099,-44.82 v2(7.342,-44.578) v2(7.977,-43.943) 8.663,-43.943 ; M4.1@7.099,-45.506 8.663,-43.943 ; 8.663,-43.943 8.816,-43.79 20.311,-43.79 20.413,-43.688 35.761,-43.688 ; 35.878,-31.536 v2(36.933,-30.481) 37.579,-31.127 M2.1@37.579,-31.536 ; 35.878,-31.536 36.083,-31.536 ; 36.083,-31.536 v2(36.806,-32.259) 36.857,-32.259 M2.1@37.579,-31.536 ; 36.083,-31.536 M2.1@37.579,-31.536
  Bottom Layer w1.27: M1.1@37.579,-45.506 37.666,-45.593 40.259,-45.593 ; M2.1@37.579,-31.536 40.473,-31.536 40.64,-31.369 ; v2(39.649,-44.679) 37.553,-44.679 36.636,-43.761 36.758,-43.638 40.464,-43.638
  other v2: 36.425,-31.624
VSYS: C1.1 C22.1 Q7.S R9.2 R39.2 U4.2 U6.5 | length 24.2
  Top Layer w0.254: R39.2@34.036,-6.477 34.036,-6.096 v1(34.29,-5.842)
  Bottom Layer w0.254: U6.5@33.3,-4.17 33.3,-4.553 R9.2@34.247,-5.5 ; 35.492,-9.7 35.852,-9.34 Q7.S@35.852,-9.296
  Bottom Layer w0.508: U4.2@22.164,-6.565 C1.1@24.37,-6.565 ; C1.1@24.385,-6.55 C22.1@26.48,-6.55 ; C22.1@27.179,-7.249 34.251,-7.249
  Bottom Layer w1.524: R9.2@34.371,-5.9 34.3,-5.971 34.3,-10.344 Q7.S@35.852,-11.896 Q7.S@35.852,-10.596 35.852,-9.752 34.893,-9.752
pads on no net: Baro1.4 debug1.shell GPS1.shell imu1.2 imu1.3 imu1.4 imu1.5 imu1.6 imu1.7 imu1.11 imu1.14 imu1.15 imu1.16 imu1.17 imu1.19 imu1.21 imu1.22 R2.3 R2.4 R2.5 R2.6 R45.1 R45.4 R45.5 R45.8 R49.3 R49.4 R49.5 R49.6 R61.4 R61.5 SW.3 SW.4 U8.3 U8.7 U8.14
copper on no net:
  other v2: 38.633,-49.251

## Polygon pours and split planes (outlines as drawn)
GND on Top Layer "Top Layer-No Net" (solid, remove dead copper, pour order 4): -9.906,-102.997 -9.906,4.826 -10.668,5.588 -10.414,5.334 59.69,5.334 59.69,-100.584 58.42,-101.854
GND-RX on Top Layer "Top Layer-No Net" (solid, remove dead copper, pour order 2): 16.129,-27.813 30.099,-27.813 30.353,-27.813 33.782,-31.242 33.782,-38.862 33.02,-39.624 14.351,-39.624 14.224,-39.624 13.462,-38.862 13.462,-31.115
GND on Bottom Layer "Top Layer-No Net" (solid, remove dead copper, pour order 6): 1.016,-100.584 2.413,-101.981 45.085,-101.981 45.212,-101.981 50.419,-96.774 49.53,-95.885 49.53,1.27 -5.588,1.27
GND on horizontal "Top Layer-No Net" (solid, remove dead copper, pour order 5): -3.581,1.803 -3.48,1.905 49.733,1.905 49.733,-101.752 51.689,-103.708 51.384,-103.403 -2.032,-103.403
GND on vertical "Top Layer-No Net" (solid, remove dead copper, pour order 9): -10.389,2.845 -9.982,3.251 54.889,3.251 54.889,-100.305 50.775,-104.419 48.311,-106.883 1.143,-106.883

## Keep-outs
Keep-Out Layer:
  lines w0.127: -0.046,-19.812 -0.06,-17.784 -0.064,-17.029 -0.075,-14.084 -0.076,-13.858 cw(c994.234,-11.554) -0.078,-10.896 -0.07,-7.627 -0.046,-4.008 0,0 ; -0.021,-17.993 -0.021,-18.541 0.045,-24.671 0.595,-24.671 cw(c0.595,-25.171) 1.095,-25.171 1.095,-25.971 cw(c0.595,-25.971) 0.595,-26.471 0.071,-26.471 ccw(c895.193,-12.838) 0.361,-39.39 0.617,-46.755 ccw(c661.906,-20.44) 0.725,-49.348 1.201,-58.588 1.272,-59.759 1.716,-66.249 2.421,-74.601 3.22,-82.302 3.935,-88.173 4.607,-93.052 5.259,-97.308 ccw(c11.905,-89.836) 11.905,-99.836 18.257,-99.836 ; 18.278,-99.836 27.828,-99.836 ; 27.848,-99.836 33.983,-99.836 ccw(c33.983,-89.836) 40.884,-97.073 41.609,-92.287 42.32,-87.024 42.994,-81.356 43.627,-75.224 44.215,-68.501 44.804,-60.223 45.032,-56.375 45.244,-52.286 45.441,-47.893 45.622,-43.141 45.785,-37.982 45.923,-32.453 46.034,-26.471 45.511,-26.471 cw(c45.511,-25.971) 45.011,-25.971 45.011,-25.171 cw(c45.511,-25.171) 45.511,-24.671 46.06,-24.671 ccw(c-1066.82,-9.586) 46.131,-17.993 ccw(c-1066.82,-9.586) 46.162,-8.736 46.105,0
  lines w0.254: 0,0 46.117,0

## Other copper
Bottom Layer:
  rectangle net 5V: 7.9,-3.3 9.9,-1.4
  rectangle net VMOTOR: 39.2,-51.4 42.139,-21.4
  region net VMOTOR: 40.7,-7.5 43.7,-7.5 45.339,-9.139 45.339,-23.638 41.809,-25.1 40.1,-25.1 40.1,-21.6 40.7,-21

## Text inside footprints (layer, text, board x,y; h text height)
D2: Mechanical 15 "1" at 9.7,-15.15 h0.75 r90
D5: Mechanical 15 "1" at 9.7,-17.436 h0.75 r90
R2: Mechanical 1 "R1" at 39.523,-68.597 h0.3 r270
R8: Mechanical 1 "R1" at 27.899,-52.22 h0.3 r180
R45: Mechanical 1 "R1" at 28.199,-78.52 h0.3 r180
R46: Mechanical 1 "R1" at 22.599,-78.52 h0.3 r180
R47: Mechanical 1 "R1" at 39.523,-73.059 h0.3 r270
R48: Mechanical 1 "R1" at 12.201,-50.12 h0.3 r180
R49: Mechanical 1 "R1" at 39.523,-70.011 h0.3 r270
R56: Mechanical 1 "R1" at 33.199,-15.22 h0.3 r180
R57: Mechanical 1 "R1" at 38.28,-19.101 h0.3 r90
R58: Mechanical 1 "R1" at 24.055,-52.144 h0.3 r180
R59: Mechanical 1 "R1" at 30.514,-81.608 h0.3 r180
R61: Mechanical 1 "R1" at 16.036,-81.354 h0.3 r180
R63: Mechanical 1 "R1" at 12.201,-53.28 h0.3
U4: Bottom Overlay "*" at 21.732,-4.66 h1.27